# Altium PCB 2_RPi.PcbDoc (part 2 of 2)
Units mm, origin at the board's own origin, x right, y up, seen from the top; angles counter-clockwise.
Board outline 85.1 x 56 mm, 4 copper layers (Top Copper, Signal Layer 1, Signal Layer 2, Bottom Copper), stack 1.572 mm thick; 87 components, 122 nets, 420 pads, 84 vias.
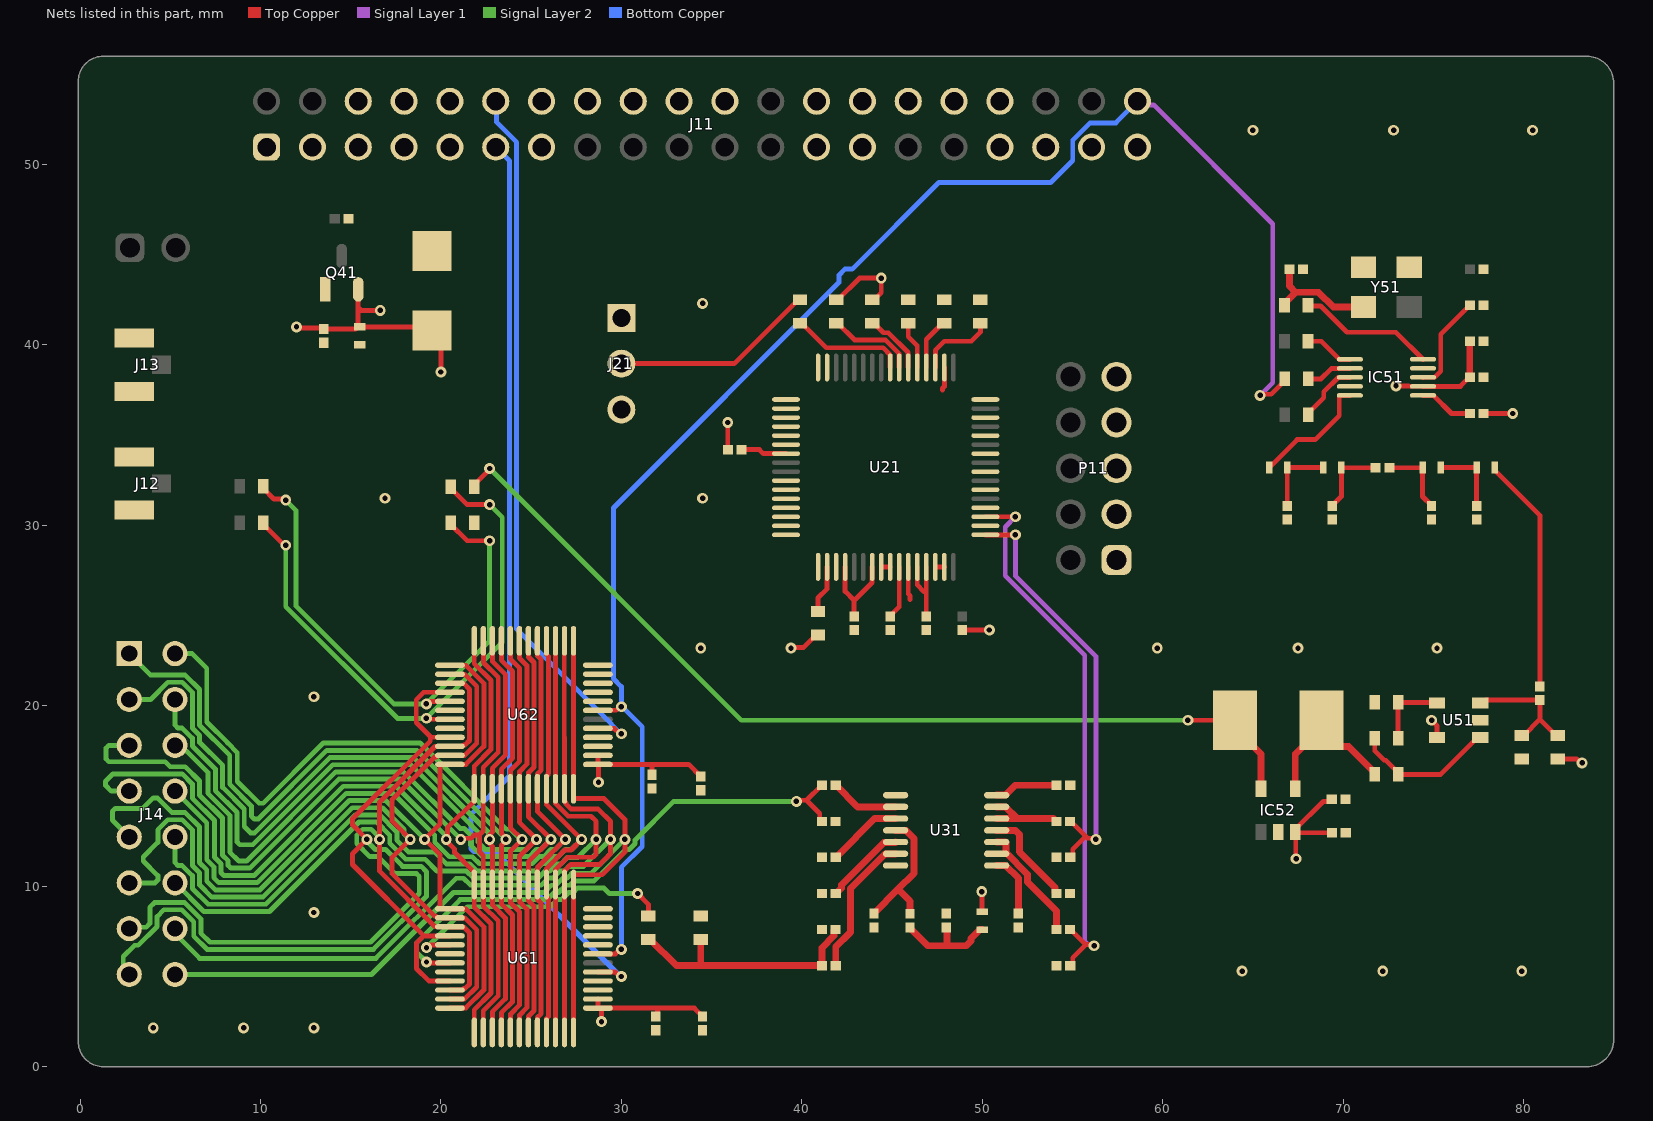
[diagram p4: the nets of this part, all layers, seen from the top]

## Via types
v1: diameter 0.6, hole 0.3, Top Copper to Bottom Copper, tented both sides, 84 vias

## Nets (pads, with @x,y where several pads share a name; then routed paths per layer and width w, separated by ;. In a path a pad name is that pad's centre, name@x,y a point inside that pad or via, vN(x,y) a via of type N, cw(c..) or ccw(c..) an arc to the next point about the centre after c; other vN are vias at no path point) (continued)
GND: C201.1 C202.1 C203.1 C301.1 C302.1 C304.1 C305.1 C306.2 C307.2 C308.1 C309.1 C401.2 C402.2 C403.1 C502.1 C503.1 C504.1 C505.1 C506.1 C507.2 C509.2 C510.1 C511.2 C513.2 C514.2 C601.2 C602.1 C603.2 C604.1 D41.2 IC51.4 IC51.9 IC52.2 J11.6 J11.9 J11.14 J11.20 J11.25 J11.30 J11.34 J11.39 J12.2 J12.3 J13.2 J13.3 J21.3 P11.1 P11.3 P11.5 P11.7 P11.9 Q41.1 R104.2 R105.1 R205.2 R206.2 R207.2 R302.1 R305.1 R306.2 R505.1 R508.1 U21.2 U21.16 U21.17 U21.18 U21.19 U21.20 U21.21 U21.22 U21.26 U21.27 U21.28 U21.29 U21.30 U21.31 U21.32 U21.33 U21.35 U21.40 U21.41 U21.43 U21.46 U21.47 U21.50 U21.52 U21.54 U21.56 U21.58 U21.60 U21.62 U21.64 U31.1 U31.7 U51.2 U61.23 U61.24 U62.23 U62.24 Y51.2 | length 4.1
  Top Copper w0.27: U21.40@44.4,27.7 U21.41@44.9,27.7 ; U21.43@45.9,27.7 45.9,26.2 46,26.1 46,25.9 ; U21.46@47.4,27.7 U21.47@47.9,27.7 ; 47.8,37.5 47.8,37.6 47.9,37.7 U21.2@47.9,38.75
  other v1: 4.064,2.148 9.064,2.148 12.964,2.148 64.4,5.3 72.2,5.3 79.9,5.3 12.964,8.548 12.964,20.5 34.4,23.2 59.7,23.2 67.5,23.2 75.2,23.2 16.9,31.5 34.5,31.5 34.5,42.3 65,51.9 72.8,51.9 80.5,51.9
MUX_SCLK: J11.40 R502.1 U61.19 U62.19 | length 89.6
  Top Copper w0.27: U61.19@28.7,6.25 28.706,6.256 29.666,6.256 29.911,6.5 v1(30,6.5) ; U62.19@28.7,19.75 28.706,19.756 29.716,19.756 29.911,19.95 v1(30,19.95) ; v1(65.4,37.2) 65.463,37.263 66.012,37.263 66.767,38.018 R502.1@66.767,38.118
  Signal Layer 1 w0.27: J11.40@58.6,53.5 58.797,53.303 59.497,53.303 66.1,46.7 66.1,37.9 v1(65.4,37.2)
  Bottom Copper w0.27: v1(30,6.5) 30,11.044 31.159,12.203 31.159,18.836 30.045,19.95 v1(30,19.95) 30,21.061 29.563,21.498 29.563,30.963 42.062,43.462 42.062,43.869 42.391,44.198 42.798,44.198 47.6,49 53.8,49 55.017,50.217 55.017,51.349 55.975,52.307 57.407,52.307 J11.40@58.6,53.5
N_IN: R105.2 R106.2 U62.41 | length 31.6
  Top Copper w0.27: R106.2@10.155,32.156 10.155,32.056 10.748,31.463 11.337,31.463 v1(11.4,31.4) ; v1(19.194,20.106) 19.284,20.106 19.422,20.244 20.494,20.244 U62.41@20.5,20.25 ; R105.2@20.55,30.05 21.45,29.15 v1(22.7,29.15)
  Signal Layer 2 w0.27: v1(11.4,31.4) 11.962,30.838 11.962,29.133 11.962,28.667 11.962,25.538 17.394,20.106 v1(19.194,20.106) 22.7,23.611 v1(22.7,29.15)
N_OUT: R103.1 U61.41 | length 16.1
  Top Copper w0.27: v1(19.2,6.6) 19.289,6.6 19.434,6.744 20.494,6.744 U61.41@20.5,6.75 ; v1(30.9,9.6) 31.5,9 R103.1@31.5,8.35
  Signal Layer 2 w0.27: v1(19.2,6.6) 21.462,8.862 26.048,8.862 26.445,9.259 26.684,9.259 27.081,9.656 27.319,9.656 27.563,9.9 29.037,9.9 29.337,9.6 v1(30.9,9.6)
NetC301_2: C301.2 L301.1 R301.2 | length 5.9
  Top Copper w0.381: R301.2@46.002,7.723 R301.2@46,7.725 46,7.7 47,6.7 48.05,6.7 ; C301.2@48,7.72 48.05,7.67 48.05,6.7 ; L301.1@50,7.6 49.871,7.6 49.369,7.098 49.369,6.969 49.1,6.7 48.05,6.7
NetC302_2: C302.2 R301.1 U31.4 | length 7.9
  Top Copper w0.381: C302.2@44,8.48 44,8.5 45.336,9.836 ; U31.4@45.2,13.1 45.215,13.085 45.787,13.085 46.217,12.654 46.217,10.718 45.336,9.836 ; R301.1@46,8.475 46,9.171 45.336,9.836
NetC303_2: C303.2 U31.2 | length 3.8
  Top Copper w0.381: C303.2@41.88,15.6 41.9,15.6 43.1,14.4 U31.2@45.2,14.4
NetC304_2: C304.2 U31.14 | length 3.5
  Top Copper w0.381: U31.14@50.8,15.05 51.294,15.05 51.844,15.6 C304.2@54.12,15.6
NetC306_1: C306.1 U31.3 | length 4.2
  Top Copper w0.381: C306.1@41.88,11.6 41.9,11.6 43,12.7 43,12.72 44.03,13.75 U31.3@45.2,13.75
NetC307_1: C307.1 U31.5 | length 4.6
  Top Copper w0.381: C307.1@41.88,9.6 41.9,9.6 42.192,9.892 42.192,10.082 44.545,12.435 45.184,12.435 U31.5@45.2,12.45
NetC309_2: C309.2 U31.8 | length 3.5
  Top Copper w0.381: U31.8@50.8,11.15 51.294,11.15 52,10.444 C309.2@52,8.48
NetC310_1: C310.1 U31.6 | length 7.9
  Top Copper w0.381: C310.1@41.88,5.6 41.88,6.631 42.7,7.451 42.7,9.872 44.613,11.785 45.184,11.785 U31.6@45.2,11.8
NetC310_2: C310.2 R103.2 R104.1 R306.1 | length 14
  Top Copper w0.381: R103.2@31.5,7.05 31.6,7.05 33.05,5.6 34.4,5.6 ; R104.1@34.4,7.05 34.4,5.6 ; R306.1@41.875,7.6 41.85,7.6 41.79,7.541 41.79,7.26 41.12,6.589 C310.2@41.12,5.6 34.4,5.6
NetC501_2: C501.2 IC51.1 | length 3
  Top Copper w0.27: IC51.1@74.425,37.2 75.005,37.2 76.005,36.2 C501.2@77.02,36.2
NetC502_2: C502.2 IC51.3 | length 5.5
  Top Copper w0.27: IC51.3@74.425,38.2 74.435,38.21 75.082,38.21 75.412,38.54 75.412,40.592 76.875,42.055 76.875,42.075 77,42.2 C502.2@77.02,42.2
NetC506_2: C506.2 R504.1 Y51.3 | length 6.5
  Top Copper w0.381: R504.1@66.75,42.2 66.75,42.3 67.367,42.918 ; C506.2@67.02,44.2 67.02,43.265 67.367,42.918 ; Y51.3@71.13,42.1 69.453,42.1 68.635,42.918 67.367,42.918
NetC507_1: C507.1 L501.1 L502.1 | length 4.1
  Top Copper w0.27: C507.1@66.9,31.08 L501.1@66.9,33.2 L502.1@68.9,33.2
NetC508_1: C508.1 C510.2 L503.1 | length 4.2
  Top Copper w0.27: C508.1@72.561,33.191 72.565,33.195 74.395,33.195 L503.1@74.4,33.2 74.4,31.6 74.9,31.1 C510.2@74.9,31.08
NetC508_2: C508.2 C509.1 L502.2 | length 4.2
  Top Copper w0.27: C509.1@69.4,31.08 69.4,31.1 69.9,31.6 L502.2@69.9,33.2 69.905,33.195 71.796,33.195 C508.2@71.801,33.191
NetC511_1: C511.1 L503.2 L504.1 | length 4.1
  Top Copper w0.27: L503.2@75.4,33.2 L504.1@77.4,33.2 C511.1@77.4,31.08
NetC512_1: C512.1 R507.1 R508.2 U51.3 | length 7.2
  Top Copper w0.27: U51.3@77.6,20.15 77.75,20.15 77.92,20.32 C512.1@80.9,20.32 80.9,19.25 ; R508.2@79.9,18.35 80,18.35 80.9,19.25 ; R507.1@81.9,18.35 81.8,18.35 80.9,19.25
NetC512_2: C512.2 L504.2 | length 13.2
  Top Copper w0.27: L504.2@78.4,33.2 78.4,33.05 80.9,30.55 C512.2@80.9,21.08
NetIC51_5: IC51.5 R504.2 | length 7.6
  Top Copper w0.27: R504.2@68.05,42.2 68.092,42.158 68.755,42.158 70.213,40.7 72.925,40.7 IC51.5@74.425,39.2
NetIC51_6: IC51.6 R503.2 | length 2.7
  Top Copper w0.27: R503.2@68.05,40.2 68.795,40.2 69.795,39.2 IC51.6@70.375,39.2
NetIC51_7: IC51.7 R502.2 | length 2.5
  Top Copper w0.27: R502.2@68.067,38.118 68.772,38.118 69.344,38.69 70.365,38.69 IC51.7@70.375,38.7
NetIC51_8: IC51.8 R501.2 | length 3.4
  Top Copper w0.27: R501.2@68.067,36.118 68.067,36.218 68.923,37.075 68.923,37.395 69.718,38.19 70.365,38.19 IC51.8@70.375,38.2
NetIC51_10: IC51.10 L501.2 | length 6.9
  Top Copper w0.27: L501.2@65.9,33.35 L501.2@65.9,33.2 67.452,34.752 68.452,34.752 69.785,36.085 69.785,37.19 69.795,37.2 IC51.10@70.375,37.2
NetIC52_4: IC52.4 R509.2 RS51.1 | length 8.5
  Top Copper w0.381: IC52.4@67.35,15.4 67.35,17.325 RS51.1@68.8,18.775 ; RS51.1@68.8,19.2 RS51.1@68.8,18.775 ; R509.2@71.75,16.2 71.75,16.3 70.31,17.74 69.835,17.74 RS51.1@68.8,18.775
NetIC52_5: IC52.5 R101.1 RS51.2 | length 52.8
  Top Copper w0.27: R101.1@21.85,32.15 21.85,32.25 22.7,33.1 v1(22.7,33.15) ; v1(61.4,19.2) RS51.2@64,19.2
  Top Copper w0.381: RS51.2@64,19.2 64,18.775 65.45,17.325 IC52.5@65.45,15.4
  Signal Layer 2 w0.27: v1(22.7,33.15) 36.65,19.2 v1(61.4,19.2)
NetJ11_1: J11.1
NetJ11_3: J11.3
NetJ11_5: J11.5
NetJ11_7: J11.7
NetJ11_8: J11.8
NetJ11_10: J11.10
NetJ11_13: J11.13
NetJ11_16: J11.16
NetJ11_18: J11.18
NetJ11_22: J11.22
NetJ11_26: J11.26
NetJ11_27: J11.27
NetJ11_28: J11.28
NetJ11_32: J11.32
NetJ11_33: J11.33
NetJ11_35: J11.35
NetJ11_37: J11.37
NetR203_1: R203.1 U21.8 | length 6.4
  Top Copper w0.27: R203.1@39.9,41.2 40,41.2 41.356,39.844 44.503,39.844 44.89,39.457 44.89,38.76 U21.8@44.9,38.75
NetR303_1: R303.1 U31.12 U31.13 | length 4.8
  Top Copper w0.381: U31.12@50.8,13.75 51.944,13.75 ; U31.13@50.8,14.4 51.294,14.4 51.944,13.75 ; R303.1@54.125,13.6 54.1,13.6 53.95,13.75 51.944,13.75
NetR304_1: R304.1 U31.9 U31.10 | length 6.5
  Top Copper w0.381: U31.10@50.8,12.45 51.294,12.45 51.309,12.435 51.309,11.862 52.508,10.663 52.508,10.243 54.125,8.626 R304.1@54.125,7.6
NetR305_2: R305.2 U31.11 | length 5.5
  Top Copper w0.381: U31.11@50.8,13.1 51.848,13.1 52.071,12.877 52.071,11.91 54.04,9.941 54.04,9.66 54.1,9.6 R305.2@54.125,9.6
NetR505_2: R505.2 R506.1 U51.4 | length 4.2
  Top Copper w0.27: R506.1@73.05,18.2 R505.2@73.05,20.2 73.075,20.175 75.175,20.175 U51.4@75.2,20.15
NetR506_2: R506.2 R509.1 U51.1 | length 8
  Top Copper w0.27: R506.2@71.75,18.2 71.75,17.5 72.267,16.983 72.368,16.983 73.05,16.3 R509.1@73.05,16.2 75.4,16.2 77.45,18.25 U51.1@77.6,18.25
NetU21_15: U21.15
NetU61_15: U61.15
NetU61_16: U61.16
NetU61_20: U61.20
NetU61_21: U61.21
NetU61_22: U61.22
NetU61_42: U61.42
NetU61_44: U61.44
NetU62_15: U62.15
NetU62_16: U62.16
NetU62_20: U62.20
NetU62_21: U62.21
NetU62_22: U62.22
NetU62_42: U62.42
NetU62_44: U62.44
NetY51_1: Y51.1
OS0: R207.1 U21.3 | length 4.4
  Top Copper w0.27: U21.3@47.4,38.75 47.4,39.7 47.9,40.2 49.4,40.2 49.9,40.7 R207.1@49.9,41.2
OS1: R206.1 U21.4 | length 2.9
  Top Copper w0.27: U21.4@46.9,38.75 46.9,40.3 47.8,41.2 R206.1@47.9,41.2
OS2: R205.1 U21.5 | length 2.7
  Top Copper w0.27: R205.1@45.9,41.2 45.9,40.457 46.4,39.957 U21.5@46.4,38.75
P_IN: R101.2 R102.2 U62.43 | length 33.3
  Top Copper w0.27: R102.2@10.155,30.156 10.155,30.056 11.311,28.9 v1(11.4,28.9) ; v1(19.194,19.306) 19.244,19.256 20.494,19.256 U62.43@20.5,19.25 ; R101.2@20.55,32.05 21.45,31.15 v1(22.7,31.15)
  Signal Layer 2 w0.27: v1(11.4,28.9) 11.4,25.5 17.594,19.306 v1(19.194,19.306) 23.4,23.511 23.4,30.45 v1(22.7,31.15)
P_OUT: C303.1 R302.2 U61.43 | length 30.3
  Top Copper w0.27: v1(19.2,5.8) 19.244,5.756 20.494,5.756 U61.43@20.5,5.75 ; v1(39.7,14.7) 39.763,14.763 40.263,14.763 ; C303.1@41.12,15.6 41.1,15.6 40.263,14.763 ; R302.2@41.125,13.6 41.112,13.6 40.997,13.715 40.997,14.03 40.263,14.763
  Signal Layer 2 w0.27: v1(19.2,5.8) 18.638,6.362 18.638,6.833 21.064,9.259 25.884,9.259 26.281,9.656 26.519,9.656 26.916,10.053 27.155,10.053 27.402,10.3 28.5,10.3 30.238,12.038 30.433,12.038 30.762,12.367 30.762,12.562 32.9,14.7 v1(39.7,14.7)
RANGE: J21.2 R203.2 | length 11.4
  Top Copper w0.27: J21.2@30,38.96 36.26,38.96 39.8,42.5 R203.2@39.9,42.5
"REF IN/OUT": C203.2 U21.42 | length 2.9
  Top Copper w0.27: C203.2@44.9,24.96 44.9,24.98 45.4,25.48 U21.42@45.4,27.7
"REF SEL": R204.2 U21.34 | length 2.7
  Top Copper w0.27: R204.2@40.9,25.23 40.9,25.982 41.4,26.482 U21.34@41.4,27.7
REFCAPx: C202.2 U21.44 U21.45 | length 4.4
  Top Copper w0.27: U21.44@46.4,27.7 46.4,26.7 46.77,26.33 46.9,26.33 ; C202.2@46.9,24.96 46.9,26.33 ; U21.45@46.9,27.7 46.9,26.33
REGCAP: C201.2 U21.36 U21.39 | length 5.2
  Top Copper w0.27: U21.36@42.4,27.7 42.4,26.337 42.9,25.837 ; C201.2@42.9,24.96 42.9,25.837 ; U21.39@43.9,27.7 43.89,27.69 43.89,26.827 42.9,25.837
S1: J14.16 U61.12 U61.25 U62.12 U62.25 | length 53.5
  Top Copper w0.27: U61.12@27.35,1.9 27.35,10.075 U61.25@27.356,10.081 ; U61.25@27.35,10.626 27.364,10.64 28.94,10.64 30.195,11.895 30.195,12.595 v1(30.2,12.6) 30.2,13.7 29.04,14.86 27.364,14.86 27.35,14.874 U62.12@27.35,15.4 U62.25@27.35,23.6 ; U61.12@27.356,1.919 U61.12@27.363,1.913
  Signal Layer 2 w0.27: J14.16@5.27,5.11 16.155,5.11 20.701,9.656 25.719,9.656 26.116,10.053 26.355,10.053 26.752,10.45 26.991,10.45 27.241,10.7 28.3,10.7 v1(30.2,12.6)
S2: J14.14 U61.11 U61.26 U62.11 U62.26 | length 53.7
  Top Copper w0.27: U61.11@26.85,1.9 U61.26@26.85,10.1 26.85,10.783 26.856,10.789 26.856,10.863 27.206,11.214 28.814,11.214 29.4,11.8 v1(29.4,12.6) 29.4,13.6 28.723,14.277 27.215,14.277 26.938,14.554 26.938,14.629 26.85,14.717 U62.11@26.85,15.4 26.85,18.255 26.838,18.267 26.838,22.905 26.85,22.917 U62.26@26.85,23.6
  Signal Layer 2 w0.27: J14.14@5.27,7.65 5.27,7.362 6.632,6 16.4,6 20.843,10.443 21.255,10.443 21.645,10.053 25.555,10.053 25.952,10.45 26.191,10.45 26.588,10.847 26.826,10.847 27.079,11.1 27.9,11.1 v1(29.4,12.6)
S3: J14.12 U61.10 U61.27 U62.10 U62.27 | length 53.6
  Top Copper w0.27: U61.10@26.35,1.9 26.351,1.901 26.351,10.099 U61.27@26.35,10.1 26.356,10.106 26.356,10.933 27.033,11.611 28.442,11.611 28.6,11.769 v1(28.6,12.6) 28.6,13.6 28.32,13.88 27.051,13.88 26.356,14.575 26.356,15.394 U62.10@26.35,15.4 26.351,15.401 26.351,23.599 U62.27@26.35,23.6
  Signal Layer 2 w0.27: J14.12@5.27,10.19 6.86,8.6 10.5,8.6 15.459,13.559 16.436,13.559 17.162,12.833 17.162,12.382 18.047,11.497 19.129,11.497 19.786,10.84 21.42,10.84 21.809,10.45 25.391,10.45 25.788,10.847 26.026,10.847 26.423,11.244 26.662,11.244 27.018,11.6 27.6,11.6 v1(28.6,12.6)
S4: J14.10 U61.9 U61.28 U62.9 U62.28 | length 53.4
  Top Copper w0.27: U61.9@25.85,1.9 25.856,1.906 25.856,2.672 25.954,2.77 25.954,9.238 25.938,9.254 25.938,9.329 25.85,9.417 U61.28@25.85,10.1 25.856,10.106 25.856,10.994 26.869,12.008 27.208,12.008 v1(27.8,12.6) 27.769,12.6 25.856,14.514 25.856,15.394 U62.9@25.85,15.4 25.85,16.083 25.938,16.171 25.938,16.254 25.954,16.27 25.954,22.73 25.856,22.828 25.856,23.594 U62.28@25.85,23.6
  Signal Layer 2 w0.27: J14.10@5.27,12.73 5.27,11.305 5.428,11.147 5.666,11.147 6.227,10.586 6.227,9.873 7.1,9 10.3,9 15.256,13.956 16.6,13.956 17.559,12.997 17.559,12.546 18.211,11.894 19.65,11.894 20.307,11.237 21.584,11.237 21.974,10.847 25.226,10.847 25.623,11.244 25.862,11.244 26.259,11.641 26.497,11.641 26.894,12.038 27.238,12.038 v1(27.8,12.6)
S5: J14.8 U61.8 U61.29 U62.8 U62.29 | length 53.1
  Top Copper w0.27: U61.8@25.35,1.9 25.356,1.906 25.356,2.734 25.557,2.935 25.557,9.065 25.356,9.266 25.356,10.094 U61.29@25.35,10.1 25.356,10.106 25.356,11.056 v1(26.9,12.6) 25.35,14.15 U62.8@25.35,15.4 25.356,15.406 25.356,16.234 25.557,16.435 25.557,22.565 25.356,22.766 25.356,23.594 U62.29@25.35,23.6
  Signal Layer 2 w0.27: J14.8@5.27,15.27 7.02,13.52 7.02,11.477 7.417,11.08 7.417,10.483 7.7,10.2 9.816,10.2 14.763,15.147 17.348,15.147 19.662,12.833 19.662,12.443 20.471,11.634 21.748,11.634 22.138,11.244 25.062,11.244 25.459,11.641 25.697,11.641 26.094,12.038 26.333,12.038 26.895,12.6 v1(26.9,12.6)
S6: J14.6 U61.7 U61.30 U62.7 U62.30 | length 53.3
  Top Copper w0.27: U61.7@24.85,1.9 24.856,1.906 24.856,2.795 25.16,3.099 25.16,8.901 24.856,9.205 24.856,10.094 U61.30@24.85,10.1 24.85,11.35 v1(26.1,12.6) 24.85,13.85 U62.7@24.85,15.4 24.856,15.406 24.856,16.295 25.16,16.599 25.16,22.401 24.856,22.705 24.856,23.594 U62.30@24.85,23.6
  Signal Layer 2 w0.27: J14.6@5.27,17.81 5.573,17.81 5.92,17.463 5.937,17.463 7.088,16.312 7.088,15.151 8.302,13.936 8.302,11.892 8.795,11.399 9.237,11.399 14.177,16.338 17.923,16.338 21.061,13.2 21.295,13.2 21.662,12.833 21.662,12.282 22.303,11.641 24.897,11.641 25.294,12.038 25.533,12.038 26.095,12.6 v1(26.1,12.6)
S7: J14.4 U61.6 U61.31 U62.6 U62.31 | length 53.6
  Top Copper w0.27: U61.6@24.35,1.9 24.356,1.906 24.356,2.857 24.763,3.264 24.763,8.736 24.356,9.143 24.356,10.094 U61.31@24.35,10.1 24.35,11.65 v1(25.3,12.6) 24.35,13.55 U62.6@24.35,15.4 24.356,15.406 24.356,16.357 24.763,16.764 24.763,22.236 24.356,22.643 24.356,23.594 U62.31@24.35,23.6
  Signal Layer 2 w0.27: J14.4@5.27,20.35 5.27,18.925 5.428,18.767 5.666,18.767 6.227,18.206 6.227,17.774 7.5,16.5 7.5,15.3 8.7,14.1 8.7,12.458 8.858,12.3 9.577,12.3 14.012,16.735 18.321,16.735 22.059,12.997 22.059,12.446 22.467,12.038 24.733,12.038 25.295,12.6 v1(25.3,12.6)
S8: J14.2 U61.5 U61.32 U62.5 U62.32 | length 52
  Top Copper w0.27: U61.5@23.85,1.9 23.856,1.906 23.856,2.918 24.366,3.428 24.366,8.572 23.856,9.082 23.856,10.094 U61.32@23.85,10.1 ; U61.32@23.85,10.111 23.85,11.95 24.392,12.492 v1@24.392,12.597 ; U62.32@23.85,23.6 23.856,23.594 23.856,22.582 24.366,22.072 24.366,16.928 23.856,16.418 23.856,15.406 U62.5@23.85,15.4 23.85,13.25 v1(24.5,12.6)
  Signal Layer 2 w0.27: J14.2@5.27,22.89 5.271,22.889 6.211,22.889 7.02,22.08 7.02,19.101 8.178,17.943 8.717,17.404 8.717,15.805 9.925,14.597 10.149,14.597 13.495,17.943 18.841,17.943 23.621,13.162 23.833,13.162 24.23,12.765 24.246,12.765 24.411,12.6 v1(24.5,12.6)
S9: J14.1 U61.4 U61.33 U62.4 U62.33 | length 53.6
  Top Copper w0.27: U61.4@23.35,1.9 23.356,1.906 23.356,2.979 23.969,3.593 23.969,8.407 23.356,9.021 23.356,10.094 U61.33@23.35,10.1 23.35,12.261 23.6,12.511 v1(23.6,12.6) 23.6,12.689 23.35,12.939 U62.4@23.35,15.4 23.35,16.474 23.969,17.093 23.969,21.907 23.35,22.526 U62.33@23.35,23.6
  Signal Layer 2 w0.27: J14.1@2.73,22.89 3.916,21.704 5.831,21.704 6.623,20.911 6.623,18.932 8.297,17.259 8.297,15.652 9.5,14.449 9.5,13.886 9.658,13.728 9.882,13.728 13.683,17.529 18.671,17.529 v1(23.6,12.6)
S10: J14.3 U61.3 U61.34 U62.3 U62.34 | length 53.6
  Top Copper w0.27: v1(22.7,12.6) v1@22.535,12.6 ; U61.3@22.85,1.9 22.856,1.906 22.856,3.041 23.572,3.757 23.572,8.243 22.85,8.965 U61.34@22.85,10.1 22.85,12.217 22.535,12.532 v1@22.535,12.6 ; U62.34@22.85,23.6 22.85,22.465 23.572,21.743 23.572,17.257 22.856,16.541 22.856,15.406 U62.3@22.85,15.4 22.85,13.002 22.535,12.687 v1@22.535,12.6
  Signal Layer 2 w0.27: J14.3@2.73,20.35 3.917,20.35 4.874,21.307 5.666,21.307 6.227,20.746 6.227,18.768 6.623,18.371 6.623,17.977 7.9,16.7 7.9,15.479 9.1,14.279 9.1,13.31 9.451,12.959 9.675,12.959 13.848,17.132 18.486,17.132 22.637,12.981 22.637,12.663 v1(22.7,12.6)
S11: J14.5 U61.2 U61.35 U62.2 U62.35 | length 53
  Top Copper w0.27: v1(21.1,12.6) 21.163,12.663 21.68,12.663 21.859,12.842 22.129,12.842 22.35,13.063 U62.2@22.35,15.4 22.35,16.597 23.175,17.422 23.175,21.578 22.356,22.398 22.356,23.594 U62.35@22.35,23.6 ; 22.138,12.833 22.138,11.917 22.35,11.705 U61.35@22.35,10.783 ; U61.2@22.35,1.9 22.35,3.097 23.175,3.922 23.175,8.078 22.356,8.898 22.356,10.094 U61.35@22.35,10.1
  Signal Layer 2 w0.27: J14.5@2.73,17.81 1.603,17.81 1.445,17.652 1.445,17.058 1.603,16.9 4.716,16.9 4.992,16.624 5.831,16.624 6.623,15.831 6.623,15.054 7.895,13.782 7.895,11.725 8.211,11.408 8.211,11.16 8.37,11.001 9.401,11.001 14.341,15.941 17.759,15.941 v1(21.1,12.6)
S12: J14.7 U61.1 U61.36 U62.1 U62.36 | length 52.3
  Top Copper w0.27: v1(20.3,12.6) v1@20.311,12.6 ; U61.36@21.84,10.66 21.84,10.785 20.756,11.869 20.756,12.059 20.311,12.505 v1@20.311,12.6 ; U61.1@21.85,1.9 21.85,3.158 22.778,4.086 22.778,7.914 21.85,8.842 U61.36@21.85,10.1 ; U62.36@21.85,23.6 21.85,22.342 22.778,21.414 22.778,17.586 21.85,16.658 U62.1@21.85,15.4 21.84,15.39 21.84,14.715 20.363,13.238 20.363,12.652 v1@20.311,12.6
  Signal Layer 2 w0.27: J14.7@2.73,15.27 1.73,15.27 1.412,15.588 1.412,15.812 1.827,16.227 5.212,16.227 5.666,16.227 6.227,15.666 6.227,15.212 6.227,14.876 7.452,13.651 7.452,11.607 7.814,11.244 7.814,10.755 7.973,10.597 9.651,10.597 14.598,15.544 17.512,15.544 20.237,12.819 20.237,12.663 v1(20.3,12.6)
S13: J14.9 U61.37 U61.48 U62.37 U62.48 | length 52
  Top Copper w0.27: U61.48@20.5,3.25 20.506,3.256 21.386,3.256 22.381,4.25 22.381,7.75 21.386,8.744 20.506,8.744 U61.37@20.5,8.75 19.974,8.75 19.96,8.764 19.96,11.74 v1(19.1,12.6) 19.96,13.46 19.96,16.736 19.974,16.75 U62.48@20.5,16.75 20.506,16.756 21.386,16.756 22.381,17.75 22.381,21.25 21.386,22.244 20.506,22.244 U62.37@20.5,22.25
  Signal Layer 2 w0.27: J14.9@2.73,12.73 1.8,13.66 1.8,14.155 1.958,14.314 3.476,14.314 4.063,14.9 4.287,14.9 5.104,14.083 5.831,14.084 6.623,13.291 6.623,11.312 7.02,10.915 7.02,10.28 7.503,9.797 9.974,9.797 14.927,14.75 16.945,14.75 19.095,12.6 v1(19.1,12.6)
S14: J14.11 U61.38 U61.47 U62.38 U62.47 | length 52.3
  Top Copper w0.27: U61.47@20.5,3.75 20.506,3.756 21.325,3.756 21.984,4.415 21.984,7.585 21.325,8.244 20.506,8.244 U61.38@20.5,8.25 19.817,8.25 19.729,8.338 19.654,8.338 17.3,10.692 17.3,11.6 v1(18.3,12.6) 17.3,13.6 17.3,14.808 19.654,17.162 19.729,17.162 19.817,17.25 U62.47@20.5,17.25 20.506,17.256 21.325,17.256 21.984,17.915 21.984,21.085 21.325,21.744 20.506,21.744 U62.38@20.5,21.75
  Signal Layer 2 w0.27: J14.11@2.73,10.19 4.155,10.19 4.313,10.348 4.313,10.587 3.503,11.397 3.503,11.621 4.313,12.432 4.313,13.126 4.874,13.687 4.939,13.687 5.666,13.687 6.227,13.126 6.227,12.751 6.227,12.399 6.227,11.148 6.623,10.751 6.623,10.077 7.3,9.4 10.139,9.4 15.092,14.353 16.765,14.353 17.956,13.162 17.956,12.923 18.279,12.6 v1(18.3,12.6)
S15: J14.13 U61.39 U61.46 U62.39 U62.46 | length 51.8
  Top Copper w0.27: U61.46@20.5,4.25 21.183,4.25 21.271,4.338 21.346,4.338 21.587,4.579 21.587,7.421 21.263,7.744 20.506,7.744 U61.39@20.5,7.75 20.494,7.756 19.675,7.756 16.6,10.831 v1(16.6,12.6) 16.6,14.669 19.675,17.744 20.494,17.744 U62.46@20.5,17.75 21.183,17.75 21.271,17.838 21.346,17.838 21.587,18.079 21.587,20.921 21.263,21.244 20.506,21.244 U62.39@20.5,21.25
  Signal Layer 2 w0.27: J14.13@2.73,7.65 2.808,7.728 3.667,7.728 3.874,7.935 3.874,8.839 4.127,9.092 5.806,9.092 6.7,8.199 6.7,7.4 7.203,6.897 16.097,6.897 18.8,9.6 18.8,10.545 18.642,10.703 17.468,10.703 16.53,11.641 16.064,11.641 15.338,12.367 15.338,12.833 15.667,13.162 16.133,13.162 16.462,12.833 16.462,12.827 16.6,12.689 v1(16.6,12.6)
S16: J14.15 U61.40 U61.45 U62.40 U62.45 | length 53.6
  Top Copper w0.27: U61.45@20.5,4.75 20.494,4.756 19.324,4.756 18.638,5.442 18.638,6.833 19.055,7.25 ; U61.40@20.5,7.25 19.055,7.25 ; U62.45@20.5,18.25 20.494,18.256 19.449,18.256 19.407,18.298 ; U62.40@20.5,20.75 19.044,20.75 18.632,20.339 18.632,19.073 19.407,18.298 ; 19.055,7.25 15.1,11.205 15.1,11.8 v1(15.9,12.6) 15.1,13.4 15.1,13.731 19.407,18.038 19.407,18.298
  Signal Layer 2 w0.27: J14.15@2.73,5.11 2.73,5.413 2.4,5.743 2.4,6.106 3.024,6.729 3.229,6.729 4.271,7.771 4.271,8.315 4.651,8.695 5.642,8.695 6.303,8.034 6.303,7.236 7.039,6.5 16.261,6.5 19.201,9.44 19.201,10.799 18.9,11.1 17.882,11.1 16.944,12.038 16.367,12.038 16.038,12.367 16.038,12.373 15.9,12.511 v1(15.9,12.6)
"SERIAL SEL": R202.1 U21.6 | length 3.5
  Top Copper w0.27: R202.1@43.9,41.2 44,41.2 44.526,40.674 44.796,40.674 45.89,39.58 45.89,38.76 U21.6@45.9,38.75
SPI1_CE0: J11.12 U62.17 | length 39.4
  Top Copper w0.27: U62.17@28.7,18.75 28.706,18.744 29.616,18.744 29.911,18.45 v1(30,18.45)
  Bottom Copper w0.27: J11.12@23.04,53.5 23.086,53.454 23.086,52.345 24.2,51.231 24.2,24.25 29.438,19.012 29.438,18.967 29.955,18.45 v1(30,18.45)
SPI1_CE1: J11.11 U61.17 | length 52.8
  Top Copper w0.27: U61.17@28.7,5.25 28.706,5.244 29.666,5.244 29.911,5 v1(30,5)
  Bottom Copper w0.27: J11.11@23.04,50.96 23.8,50.2 23.8,16.108 21.662,13.97 21.662,12.075 21.82,11.917 23.038,11.917 29.955,5 v1(30,5)
STBY: R201.1 U21.7 | length 5
  Top Copper w0.27: R201.1@41.9,41.2 42,41.2 42.923,40.277 44.632,40.277 45.39,39.519 45.39,38.76 U21.7@45.4,38.75
V1: C305.2 R303.2 U21.49 | length 23.7
  Top Copper w0.27: U21.49@50.175,29.475 v1(51.838,29.475) ; R303.2@54.875,13.6 54.9,13.6 55.737,12.763 ; C305.2@54.88,11.6 54.888,11.6 55.013,11.725 55.013,12.04 55.737,12.763 ; v1(56.3,12.6) 56.237,12.663 55.837,12.663 55.737,12.763
  Signal Layer 1 w0.27: v1(51.838,29.475) 51.838,27.2 56.3,22.739 v1(56.3,12.6)
V2: C308.2 R304.2 U21.51 | length 31.1
  Top Copper w0.27: U21.51@50.175,30.475 v1(51.838,30.475) ; R304.2@54.875,7.6 54.9,7.6 55.737,6.763 ; C308.2@54.88,5.6 54.888,5.6 55.013,5.725 55.013,6.04 55.737,6.763 ; v1(56.2,6.7) 56.137,6.763 55.737,6.763
  Signal Layer 1 w0.27: v1(51.838,30.475) 51.272,29.909 51.272,27.205 55.68,22.797 55.68,6.953 55.871,6.763 56.137,6.763 v1(56.2,6.7)
VDD: C204.2 C205.2 C402.1 C403.2 C501.1 C503.2 C504.2 C513.1 C514.1 C601.1 C602.2 C603.1 C604.2 D41.1 IC51.2 IC52.3 J21.1 L301.2 Q41.2 R201.2 R202.2 R204.1 R507.2 U51.5 U61.13 U61.14 U62.13 U62.14 | length 56.1
  Top Copper w0.27: v1(12,41) 12.06,40.94 13.44,40.94 C402.1@13.5,40.88 15.28,40.88 15.4,41 C403.2@15.5,41 19.3,41 D41.1@19.5,40.8 20,40.3 v1(20,38.5) ; C403.2@15.415,41.075 15.415,42.074 ; Q41.2@15.415,43.073 15.415,42.074 ; v1(16.635,41.914) 15.575,41.914 15.415,42.074 ; U61.13@28.7,3.25 U61.14@28.7,3.75 ; U62.14@28.7,17.25 U62.13@28.7,16.75 U62.13@28.721,16.75 ; v1(28.735,15.764) 28.735,16.736 U62.13@28.721,16.75 ; v1(28.9,2.5) 28.9,3.236 28.914,3.25 32,3.25 ; C602.2@31.7,16.18 31.7,16.75 ; C604.2@31.9,2.78 32,2.88 32,3.25 ; C601.1@34.4,16.08 33.73,16.75 31.7,16.75 ; C603.1@34.5,2.78 34.5,2.8 34.05,3.25 32,3.25 ; C204.2@35.9,34.2 v1(35.9,35.7) ; v1(39.4,23.2) 39.435,23.235 40.105,23.235 40.8,23.93 R204.1@40.9,23.93 ; R201.2@41.9,42.5 42,42.5 43.2,43.7 v1(44.4,43.7) 44.4,42.9 44,42.5 R202.2@43.9,42.5 ; C205.2@48.9,24.2 v1(50.4,24.2) ; v1(49.977,9.701) 49.988,9.689 49.988,8.612 L301.2@50,8.6 ; IC52.3@67.35,13.15 68.897,14.697 69.243,14.697 C513.1@69.368,14.822 C513.1@69.353,14.838 ; v1(67.396,11.529) 67.373,11.552 67.373,12.953 67.385,12.965 C514.1@69.385,12.965 ; v1(72.93,37.73) 73.635,37.73 73.655,37.71 74.415,37.71 IC51.2@74.425,37.7 76.5,37.7 77,38.2 C503.2@77.02,38.2 ; v1(74.9,19.2) 74.9,19.189 75.2,18.889 U51.5@75.2,18.25 ; C501.1@77.78,36.2 v1(79.4,36.2) ; R507.2@81.9,17.05 82.939,17.05 83.151,16.838 v1(83.24,16.838) ; U62.13@28.721,16.75 31.7,16.75
  Top Copper w0.381: C503.2@77.02,38.2 C504.2@77.02,40.2
VDRIVE: C204.1 U21.23 | length 2.3
  Top Copper w0.27: C204.1@36.9,34.2 37.647,34.2 37.872,33.975 U21.23@39.125,33.975

## Polygon pours and split planes (outlines as drawn)
VDD on Signal Layer 1 "VDD_L02_P002" (solid, pour order 2): 0.7,55.2 84.194,55.2 84.194,54.6 84.5,1.3 83.598,0.302 0.8,0.7
GND on Signal Layer 2 "GND_L03_P003" (solid, pour order 3): 83.584,0.296 0.8,0.7 0.7,55.2 84.2,55.2 84.5,1.3
GND on Bottom Copper "GND_L04_P004" (solid, pour order 4): 83.6,0.311 0.8,0.7 0.7,55.2 84.2,55.2 84.5,1.3
GND on Top Copper "GND_L01_P001" (solid, pour order 1): 84.5,1.3 83.6,0.3 0.8,0.7 0.7,55.2 84.2,55.2

## Silkscreen, mask and mechanical layers (free items; w line width, h text height)
Top Overlay:
  drawing of 66 lines, arcs and shapes, not listed
  text "EXT_ / INPUT" at 0.5,49 h1.3
  text "Wave_Gen." at 61.45,48.067 h1.3
  text "ADC_AD7606" at 32.831,47.907 h1.3
  text "-" at 5,42.9 h1
  text "+" at 2.483,42.833 h1
  text "+10v" at 28.25,40.45 h0.7 r90
  text "V8" at 52.05,37.85 h0.7
  text "G" at 59.15,37.85 h0.7
  text "-" at 5.8,36.2 h1
  text "+5v" at 28.5,35.4 h0.7 r90
  text "V7" at 52.05,35.35 h0.7
  text "G" at 59.15,35.35 h0.7
  text "+5v_Reg." at 8.851,34.401 h1.3
  text "Range" at 27.8,33.9 h0.7
  text "V6" at 52.108,32.841 h0.7
  text "G" at 59.15,32.75 h0.7
  text "V5" at 52.108,30.241 h0.7
  text "G" at 59.15,30.25 h0.7
  text "+" at 5.7,29.733 h1
  text "Ext_ / Input" at 14.2,28.4 h1
  text "WG_ / Input" at 25.9,28.4 h1
  text "V4" at 52.108,27.741 h0.7
  text "G" at 59.177,27.685 h0.7
  text "MUX_16_elec." at 0.9,26 h1.3
  text "Cur_Sense" at 61.691,24.771 h1.3
  text "9" at 8.149,22.501 h1.52 r90
  text "8" at 9.613,22.505 h1.52 r90
  text "7" at 9.656,20.101 h1.52 r90
  text "10" at 8.144,19.803 h1.52 r90
  text "6" at 9.55,17.75 h0.7 r90
  text "11" at 8.149,17.397 h1.52 r90
  text "5" at 9.55,15.15 h0.7 r90
  text "12" at 8.115,14.737 h1.52 r90
  text "Sin." at 34,12.9 h1 r270
  text "Dif." at 31.2,12.8 h1 r270
  text "4" at 9.55,12.45 h0.7 r90
  text "13" at 8.154,12.003 h1.52 r90
  text "3" at 9.55,9.85 h0.7 r90
  text "14" at 8.152,9.4 h1.52 r90
  text "2" at 9.55,7.25 h0.7 r90
  text "15" at 8.156,6.9 h1.52 r90
  text "EIT-RPi Shield" at 66.016,5.789 h2
  text "1" at 9.55,4.95 h0.7 r90
  text "16" at 8.05,4.65 h0.7 r90
  text "V1.0 | 07-2024" at 71.048,1.764 h1.52
  text "Phase_Ampl_Detec" at 39.25,0.883 h1.3
Bottom Overlay:
  lines w0.254: 8.771,45.615 60.5,45.615 ; 11.571,43.015 11.571,48.215 ; 14.271,43.015 14.271,48.215 ; 16.771,43.015 16.771,48.115 ; 19.371,43.115 19.371,48.215 ; 21.609,43.003 21.609,48.103 ; 24.583,43.121 24.583,48.221 ; 26.871,43.015 26.871,48.215 ; 29.571,43.115 29.571,48.215 ; 32.071,43.015 32.071,48.215 ; 34.633,42.944 34.633,48.144 ; 37.171,43.015 37.171,48.015 ; 39.851,43.041 39.851,48.041 ; 42.271,43.115 42.271,48.015 ; 44.771,43.015 44.771,48.015 ; 47.359,43.015 47.359,48.015 ; 49.886,43.025 49.886,48.025 ; 52.196,43.123 52.196,48.023 ; 54.961,43.03 54.961,48.03 ; 57.762,43.025 57.762,48.025
  text "MUX_D / WG_D" at 57.571,51.901 h0.7 r90
  text "WG_CLK / MUX_CLK" at 60.8,51.465 h0.7 r90
  text "MUX_I / CE0" at 24.266,51.224 h0.7 r90
  text "WG / CE2" at 54.714,51.228 h0.7 r90
  text "ADC / CS0" at 39.6,50.765 h0.7 r90
  text "GND" at 15.921,47.965 h0.7 r90
  text "GND" at 25.921,47.965 h0.7 r90
  text "GND" at 33.721,47.965 h0.7 r90
  text "GND" at 46.421,47.965 h0.7 r90
  text "GND" at 51.482,47.795 h0.7 r90
  text "5v" at 10.521,47.265 h0.7 r90
  text "5v" at 13.221,47.265 h0.7 r90
  text "ADC / RESET" at 47.129,45.425 h0.7 r90
  text "ADC / CONV" at 49.723,45.434 h0.7 r90
  text "MUX_O / CE1" at 24.212,45.415 h0.7 r90
  text "ADC / SCLK" at 39.671,45.394 h0.7 r90
  text "ADC / BUSY" at 29.3,45.3 h0.7 r90
  text "GND" at 41.336,45.277 h0.7 r90
  text "GND" at 59.423,45.237 h0.7 r90
  text "3v3" at 10.521,45.065 h0.7 r90
  text "GND" at 20.921,45.065 h0.7 r90
  text "3v3" at 31.121,45.065 h0.7 r90
  text "DA" at 33.721,45.065 h0.7 r90
  text "DB" at 36.321,45.065 h0.7 r90
Mechanical 1:
  lines w0.254: -0.1,1.4 ccw(c1.3,1.4) 1.3,0 83.5,0 ccw(c83.5,1.5) 85,1.5 85,54.5 ccw(c83.5,54.5) 83.5,56 1.4,56 1.3,56 ccw(c1.3,54.6) -0.1,54.6 -0.1,1.4